# Altium PCB wulpus_pro_shield.PcbDoc (part 2 of 3)
Units mm, origin at the board's own origin, x right, y up, seen from the top; angles counter-clockwise.
Board outline 44.9 x 21 mm, 6 copper layers (Top Layer, Layer 2, Layer 3, Layer 4, Layer 5, Bottom Layer), stack 0.913 mm thick; 186 components, 134 nets, 731 pads, 283 vias.
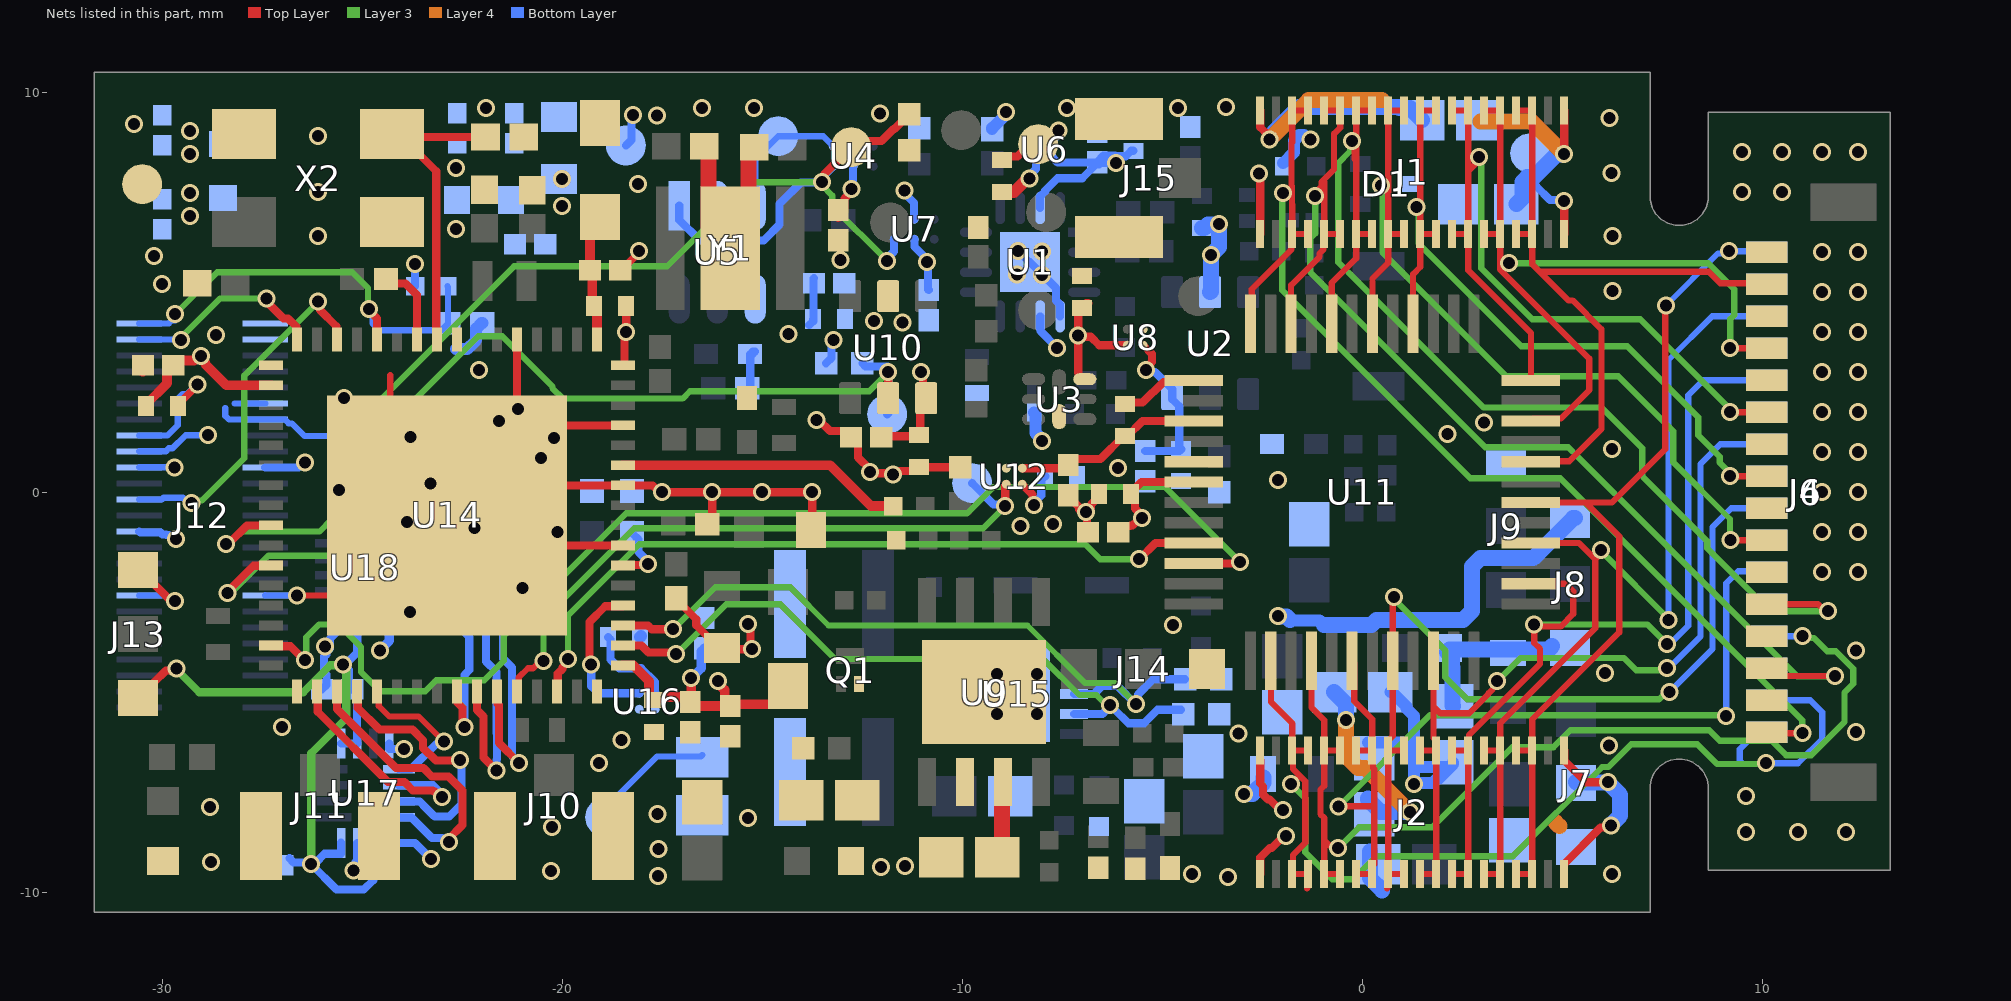
[diagram p6: the nets of this part, all layers, seen from the top]

## Part data (continued)
R15: library part CMP-2000-00700-2, Manufacturer=Panasonic, Package=0603, Power Rating=0.1W, Resistance=0Ω, Temperature="-55°C to +155°C", Temperature Coefficient=-100/+600ppm/°C, Temperature Range High=+155°C, Temperature Range Low=-55°C, Tolerance=5%, Voltage Rating=75V, Automotive=Yes, Automotive Grade="Grade 0", Category=Res, ComponentLink2Description=Datasheet, ComponentLink2URL=https://industrial.panasonic.com/cdbs/www-data/pdf/RDA0000/AOA0000C301.pdf, Composition="Thick Film", Device Class L1="Passive Components", Device Class L2=Resistors, Device Class L3="Chip SMD Resistors", Digikey Description="RES SMD 0 OHM JUMPER 1/10W 0603", Footprint Url=https://industrial.panasonic.com/cdbs/www-data/pdf/RDA0000/DMA0000COL17.pdf, Height=0.55mm, Ipc Land Pattern Name=RESC16080X45, Lead Free=Yes, Manufacturer Part Number=ERJ-3GEY0R00V, Mouser Description="Resistor, Chip Thick Film, 0 Ohm, 0.1w, Resistor, Chip Thick Film, 0 Ohm, 0.1w, 5%", Octopart=https://octopart.com/erj-3gey0r00v-panasonic-55389238, RoHS=TRUE, Series=ERJ
R21 R34: library part CMP-00030-23798141-1, Case/Package=0402, Max Operating Temperature=155°C, Min Operating Temperature=-55°C, Power Rating=63mW, Resistance=400Ohm, Temperature Coefficient=100ppm/°C, Tolerance=1%, Voltage Rating=50V, Composition="Thick Film", Height=350µm, Lead Free="Lead Free", NexarPartId=23798141, RoHS=Compliant, Schedule B="8533210045, 8533210045"
R23: "Resistor", Manufacturer_Name=Panasonic, Mouser Part Number=667-ERJ-PA3J302V, Datasheet Link=https://industrial.panasonic.com/cdbs/www-data/pdf/RDO0000/AOA0000C331.pdf, Height=0.55mm, Manufacturer_Part_Number=ERJ-PA3J302V, Mouser Price/Stock=https://www.mouser.co.uk/ProductDetail/Panasonic/ERJ-PA3J302V?qs=BzJM0faLVqU1ZJAPCjWnWA%3D%3D, Res="3k 1/3W"
R24: Manufacturer_Name=Panasonic, Mouser Part Number=667-ERJ-PA3J302V, Datasheet Link=https://industrial.panasonic.com/cdbs/www-data/pdf/RDO0000/AOA0000C331.pdf, Height=0.55mm, Manufacturer_Part_Number=ERJ-PA3J302V, Mouser Price/Stock=https://www.mouser.co.uk/ProductDetail/Panasonic/ERJ-PA3J302V?qs=BzJM0faLVqU1ZJAPCjWnWA%3D%3D, Res="3k 1/3W"
R26 R29: library part CMP-13261-002896-1, Case Code (Imperial)=0402, Case Code (Metric)=1005, Max Operating Temperature=155°C, Max Power Dissipation=63mW, Min Operating Temperature=-55°C, Resistance=390kR, Temperature Coefficient=100ppm/°C, Tolerance=1%, Voltage Rating (DC)=50V, Case/Package=0402, Composition="Thick Film", Contact Plating=Tin, Depth=0.5mm, Features="Moisture Resistant", Height=0.016inch, Lead Free="Lead Free", Length=0.039inch, Military Standard=Not, Number of Terminations=2, Packaging="Tape and Reel", Radiation Hardening=No, Width=0.02inch
R27 R28 R45: library part CMP-2002-00608-4, Case Code (Imperial)=0402, Case Code (Metric)=1005, Max Operating Temperature=155°C, Max Power Dissipation=100mW, Min Operating Temperature=-55°C, Package Quantity=1, Resistance=100kR, Temperature Coefficient=100ppm/°C, Tolerance=1%, Voltage Rating=50V, Case/Package=0402, Composition="Thick Film", Contact Plating=Tin, Depth=0.5mm, Features="Automotive AEC-Q200", Height=0.35mm, Lead Free="Lead Free", Length=1mm, Military Standard=Not, Mount="Surface Mount", Number of Pins=2, Number of Terminations=2, Packaging="Tape and Reel", Power Rating=100mW, Radiation Hardening=No, REACH SVHC="No SVHC", Termination=SMD/SMT, Voltage Rating (DC)=50V, Width=0.5mm
R31 R32: library part CMP-2002-08314-2, "RES Thick Film, 1MΩ, 1%, 0.063W, 100ppm/°C, 0402", Case Code (Imperial)=0402, Case Code (Metric)=1005, Max Operating Temperature=155°C, Max Power Dissipation=63mW, Min Operating Temperature=-55°C, Package Quantity=10, Resistance=1M, Temperature Coefficient=100ppm/°C, Tolerance=1%, Voltage Rating=50V, Case/Package=0402, Composition="Thick Film", Contact Plating=Tin, Depth=0.5mm, Features="Automotive AEC-Q200", Height=0.35mm, Lead Free="Lead Free", Length=1mm, Military Standard=Not, Number of Pins=2, Number of Terminations=2, Packaging="Tape and Reel", Power Rating=63mW, Radiation Hardening=No, Termination=SMD/SMT, Voltage Rating (DC)=50V, Weight=2.3E-05oz, Width=0.02inch
R33: library part CMP-00030-23798141-1, Case/Package=0402, Max Operating Temperature=155°C, Min Operating Temperature=-55°C, Power Rating=63mW, Resistance=22Ω, Temperature Coefficient=100ppm/°C, Tolerance=1%, Voltage Rating=50V, Composition="Thick Film", Height=350µm, Lead Free="Lead Free", NexarPartId=23798141, RoHS=Compliant, Schedule B="8533210045, 8533210045"
R35 R38: library part CMP-2002-07961-1, Manufacturer="Yageo / Phycomp", Resistance=22, Part Number=RC0402JR-0722RL
R36: library part CMP-2002-03257-1, Manufacturer="TE Connectivity / AMP", Resistance=324, Part Number=CPF0402B324RE1
R37: library part CMP-02407-007705-1, "RES Thick Film, 47kΩ, 1%, 0.063W, 100ppm/°C, 0402", Case Code (Imperial)=0402, Case Code (Metric)=1005, Max Operating Temperature=155°C, Min Operating Temperature=-55°C, Package Quantity=10000, Power Rating=63mW, Resistance=47k, Temperature Coefficient=100ppm/°C, Tolerance=1%, Voltage Rating=50V, Case/Package=0402, Composition="Thick Film", Contact Plating=Tin, Depth=0.5mm, Height=0.35mm, Lead Free="Lead Free", Length=1mm, Military Standard=Not, Mount="Surface Mount", Number of Terminations=2, Packaging="Tape and Reel", Radiation Hardening=No, Termination=SMD/SMT, Voltage Rating (DC)=50V, Weight=2.3E-05oz, Width=0.5mm, Working Voltage=50V
R39 R42: Manufacturer_Name=Panasonic, Mouser Part Number=667-ERJ-2RKF1004X, Resistance=1MOhm, Arrow Part Number=ERJ-2RKF1004X, Arrow Price/Stock=https://www.arrow.com/en/products/erj-2rkf1004x/panasonic?region=nac, Height=0.4mm, Manufacturer_Part_Number=ERJ-2RKF1004X, Mouser Price/Stock=https://www.mouser.co.uk/ProductDetail/Panasonic/ERJ-2RKF1004X?qs=H7k1u0Mp9JTG%252BclS6LVdqw%3D%3D, Res=1MOhm
R40: Manufacturer_Name=Panasonic, Mouser Part Number=667-ERJ-2RKF4322X, Resistance=43.2kOhm, Datasheet Link=https://industrial.panasonic.com/cdbs/www-data/pdf/RDA0000/AOA0000C86.pdf, Height=0.4mm, Manufacturer_Part_Number=ERJ-2RKF4322X, Mouser Price/Stock=http://www.mouser.com/Search/ProductDetail.aspx?qs=YMBIwoNQYdULE5GECeB%2fdA%3d%3d
R41: Manufacturer_Name=Panasonic, Mouser Part Number=667-ERJ-2RKF4122X, Resistance="41.2 kΩ", Arrow Part Number=ERJ-2RKF4122X, Arrow Price/Stock=https://www.arrow.com/en/products/erj-2rkf4122x/panasonic?utm_currency=USD&region=nac, Datasheet Link=https://industrial.panasonic.com/cdbs/www-data/pdf/RDA0000/AOA0000C86.pdf, Height=0.4mm, Manufacturer_Part_Number=ERJ-2RKF4122X, Mouser Price/Stock=https://www.mouser.co.uk/ProductDetail/Panasonic/ERJ-2RKF4122X?qs=YMBIwoNQYdUCaGOKDy4kUA%3D%3D
TP1 TP2 TP3 TP4 TP6 TP7 TP8 TP9 TP10 TP11 TP12 TP13 TP14 TP15: library part CMP-0484-00002-1, "Test Point, Surface Mount, Circular, Pad Diameter 1 mm"
U1: library part CMP-09116-000032-1, "IC OPAMP VGA 1 CIRCUIT 16LFCSP", Manufacturer="Analog Devices", Max Junction Temp=+150°C, Max Supply Voltage=5V, Min Supply Voltage=3V, Nominal Supply Current=3-6mA, Output Current per Channel=5mA, Package=CP-16-22, Temperature="-40°C to +85°C", Temperature Range High=+85°C, Temperature Range Low=-40°C, Voltage Gain=80dB, Automotive=No, Bandwidth=18MHz, Category=IC, ComponentLink2Description=Datasheet, ComponentLink2URL=https://www.analog.com/media/en/technical-documentation/data-sheets/AD8338.pdf, Device Class L1="Integrated Circuits (ICs)", Device Class L2="Linear ICs", Device Class L3="Amplifiers - Op Amps", Digikey Description="IC OPAMP VGA 1 CIRCUIT 16LFCSP", Height=0.8mm, Ipc Land Pattern Name=QFN50P300X300X75-16, Lead Free=Yes, Manufacturer Part Number=AD8338ACPZ-R7, Mouser Description="Special Purpose Amplifiers Ultra Low Pwr 18MHz SGL CH VGA", Number of Channels=1, Octopart=https://octopart.com/ad8338acpz-r7-analog+devices-21054770, RoHS=TRUE
U2 U10: library part CMP-0018-00480-2, "Very Low Power, Rail to Rail Out, Negative Rail In, VFB Operational Amplifier, 2.5 to 5.5 V, -40 to 125 degC, 6-pin SOT23 (DBV6), Green (RoHS & no Sb/Br)", Manufacturer="Texas Instruments", 2nd Harmonic(dBc)=85, 3rd Harmonic(dBc)=105, @ MHz=1, Acl, min stable gain(V/V)=1, BW @ Acl(MHz)=205, Code_JEDEC=MO-178, ComponentLink1Description="Manufacturer URL", ComponentLink1URL=http://www.ti.com/, ComponentLink2Description=Datasheet, ComponentLink2URL=http://www.ti.com/general/docs/lit/getliterature.tsp?genericPartNumber=OPA836&fileType=pdf, ComponentLink3Description="Package Specification", ComponentLink3URL=http://www.ti.com/litv/pdf/mpds026h, DatasheetVersion=SLOS712D, Eco-Plan="Green (RoHS & no Sb/Br)", Iib(Max)(nA)=1000, Io(Typ)(mA)=50, Iq per channel(Max)(mA)=1, Mounting Technology="Surface Mount", Number of Channels=1, PackageDescription="6-Pin Plastic Small Outline, Body 1.6 x 2.9 mm, Pitch 0.95 mm", PackageReference=DBV0006A, PackageVersion="4073253-5/K, 03/2006", PartNumber=OPA836IDBVT, Settling Time (0.1%)(Typ)(ns)=30, Slew Rate(Typ)(V/us)=560, Sub Family="Audio Operational Amplifier, High Output Current Amplifier (>=50mA), High Speed Amplifier (>=50MHz), Low Noise Amp (<=10nV/rtHz), Low Offset Voltage Amplifier (<=500uV), Low Supply Voltage Amplifier (<=2.7V)", Vio(Max)(mV)=0.4, Vn at Flatband(Typ)(nV/rtHz)=4.6, Vs(Max)(V)=5.5, Vs(Min)(V)=2.5
U3: library part CMP-0004-01511-1, "256-Tap, 100 k, Single Channel Potentiometer with SPI Interface, -40 to 125 degC, 8-pin QFN (RSE8), Green (RoHS & no Sb/Br)", Manufacturer="Texas Instruments", Code_JEDEC=MO-288, ComponentLink1Description="Manufacturer URL", ComponentLink1URL=http://www.ti.com/, ComponentLink2Description=Datasheet, ComponentLink2URL=http://www.ti.com/general/docs/lit/getliterature.tsp?genericPartNumber=TPL0501-100&fileType=pdf, ComponentLink3Description="Package Specification", ComponentLink3URL=http://www.ti.com/litv/pdf/mpqf207b, DAC Channels=1, DatasheetVersion=SLIS136A, DNL(Max)(+/-LSB)=0.5, Eco-Plan="Green (RoHS & no Sb/Br)", INL(Max)(+/-LSB)=1, Interface=SPI, Mounting Technology="Surface Mount", PackageDescription="8-Pin Plastic Quad Flatpack No-Pin, 1.5 x 1.5 mm Body, 0.5 mm Pitch", PackageReference=RSE8, PackageVersion="4207268-2/D, 01/2011", PartNumber=TPL0501-100RSER, Settling Time(us)=3, SubFamily="Digital Potentiometer"
U4 U7: "Analogue Switch ICs SPDT ANALOG SWITCH", Manufacturer_Name="Texas Instruments", Arrow Part Number=TS5A3159AYZPR, Arrow Price/Stock=https://www.arrow.com/en/products/ts5a3159ayzpr/texas-instruments?utm_currency=USD&region=nac, Datasheet Link=https://www.ti.com/lit/ds/symlink/ts5a3159a.pdf?ts=1623385377964&ref_url=https%253A%252F%252Fwww.ti.com%252Fproduct%252FTS5A3159A, Geometry.Height=0.5mm, Manufacturer_Part_Number=TS5A3159AYZPR
U5: library part CMP-09141-000004-1, "IC RF DETECT 100KHZ-1GHZ TSOT23", Manufacturer="Analog Devices", Max Frequency=1000MHz, Max Junction Temp=+125°C, Package=TSOT-23, Temperature="-40°C to +85°C", Temperature Range High=+85°C, Temperature Range Low=-40°C, Automotive=No, Bandwidth=999.9MHz, Category=IC, ComponentLink2Description=Datasheet, ComponentLink2URL=https://www.analog.com/media/en/technical-documentation/data-sheets/5507f.pdf, Device Class L1="Integrated Circuits (ICs)", Device Class L2="RF Semiconductors and Devices", Device Class L3=unset, Digikey Description="IC RF DETECT 100KHZ-1GHZ TSOT23", Height=1mm, Ipc Land Pattern Name=SOT95P280X91-6, Lead Free=Yes, Manufacturer Part Number=LTC5507ES6#TRMPBF, Mouser Description="RF Detector 0.1MHz to 1000MHz 14dBm Automotive 6-Pin TSOT-23 T/R", Octopart=https://octopart.com/ltc5507es6%23trmpbf-analog+devices-88320008, RoHS=TRUE, Standoff Height=0.01mm
U6 U8 U12 U16: "TPS22916 5.5-V, 2-A Ultra-Low Leakage Load Switch", Manufacturer_Name="Texas Instruments", Arrow Part Number=TPS22916CYFPR, Arrow Price/Stock=https://www.arrow.com/en/products/tps22916cyfpr/texas-instruments?utm_currency=USD&region=nac, Datasheet Link=http://www.ti.com/lit/gpn/tps22916, Geometry.Height=0.5mm, Manufacturer_Part_Number=TPS22916CYFPR
U9: "Integrated Circuit", Manufacturer_Name=LITTELFUSE, Mouser Part Number=849-IXDD604D2TR, Arrow Part Number=IXDD604D2TR, Arrow Price/Stock=https://www.arrow.com/en/products/ixdd604d2tr/ixys, Datasheet Link=http://www.ixysic.com/home/pdfs.nsf/www/IXD_604.pdf/$file/IXD_604.pdf, Height=1mm, Manufacturer_Part_Number=IXDD604D2TR, Mouser Price/Stock=https://www.mouser.co.uk/ProductDetail/IXYS-Integrated-Circuits/IXDD604D2TR?qs=RF%252Bx3zajg8LeQlBgW9OO7w%3D%3D
U11: "16-CH 200V No Hv Bias Switch (SPST), 2 Bleed Resistor 48 LQFP 7X7X1.4MM T/r Rohs Compliant: Yes", Manufacturer=Microchip, Category="Decoders and Multiplexers", Manufacturer Part Number=HV2707T-C/R8X, Pricing 1="1=19.01000, 25=15.84720, 100=14.65500 (USD)", RoHS=Yes, Stock 1=440, Supplier 1=Digi-Key
U14: "No Description Available", Mfr_Name="Texas Instruments", Copyright="Copyright (C) 2021 Ultra Librarian. All rights reserved.", Manufacturer_Part_Number=MSP430FR5043IRGCT, RefDes=RefDes, Type=DEV
U15: library part CMP-0478-00030-1, "Dual Micropower DC/DC Converters with Schottky Diodes, 2.4 to 15 V Vin, 10-pin SON (DD-10), -40 to 85 degC, Pb-Free", Manufacturer="Linear Technology", PartNumber=LT3463AEDD#PBF, Code_JEDEC=MO-229, ComponentLink1Description="Manufacturer URL", ComponentLink1URL=http://www.linear.com/, ComponentLink2Description=Datasheet, ComponentLink2URL=http://cds.linear.com/docs/en/datasheet/3463f.pdf, ComponentLink3Description="Package Specification", ComponentLink3URL=http://cds.linear.com/docs/en/packaging/DFN_10_05-08-1699.pdf, Mounting Technology="Surface Mount", Number Of Outputs=2, PackageDescription="10-Pin Plastic DFN, Body 3 x 3 mm, Pitch 0.5 mm", PackageReference=DD-10, PackageVersion="Rev. C, 06/2010", RoHS=TRUE, Vin Max(V)=15, Vin Min(V)=2.4
U17 U18: "Voltage Level Translator Bidirectional 1 Circuit 4 Channel 380Mbps 16-UQFN _2.6x1.8_", Package="UQFN-16 Texas Instruments", Digi-Key_Part_Number=296-24741-1-ND, DigiKey-Purchase-URL=https://snapeda.com/shop?store=DigiKey&id=192411, MF="Texas Instruments", MP=SN74AVC4T774RSVR, SnapEDA_Link=https://www.snapeda.com/parts/SN74AVC4T774RSVR/Texas%20Instruments/view-part/192411/?ref=snap
X2: "Crystal 8MHz ±30ppm (Tol) ±30ppm (Stability) 18pF FUND 100Ohm 4-Pin SMD T/R", Case/Package=SMD/SMT, ESR (Equivalent Series Resistance)=100R, Frequency=8MHz, Frequency Stability=30ppm, Load Capacitance=18pF, Manufacturer=Diodes, Max Operating Temperature=85°C, Min Operating Temperature=-40°C, Supplier Part Number 1=FY0800018CT-ND, Category=Crystals, ComponentLink1Description=http://media.digikey.com/pdf/Data%20Sheets/Pericom%20PDFs/FY0800018_VerB.pdf?src-supplier=Digi-Key, ComponentLink1URL=http://media.digikey.com/pdf/Data%20Sheets/Pericom%20PDFs/FY0800018_VerB.pdf?src-supplier=Digi-Key, Frequency Tolerance=30ppm, Height=0.043inch, Length=0.197inch, Manufacturer Part Number=FY0800018, Mount="Surface Mount", Packaging="Cut Tape", Pricing 1="1=0.80000, 10=0.70800, 50=0.66220, 100=0.58520, 500=0.55440 (USD)", RoHS=Yes, Stock 1=10869, Supplier 1=Digi-Key, Width=0.126inch
Y1: "No Description Available", Frequency=8MHz, Mfr_Name=Abracon, Copyright="Copyright (C) 2021 Ultra Librarian. All rights reserved.", Manufacturer_Part_Number=AWSCR-8.00CV-T, RefDes=RefDes, Type=DEV
Y2: library part CMP-27762-000002-3, "CRYSTAL 32.7680KHZ 9PF SMD", Case/Package=CSMD, ESR (Equivalent Series Resistance)=90kR, Frequency=32.768kHz, Frequency Tolerance=20ppm, Load Capacitance=9pF, Max Operating Temperature=85°C, Min Operating Temperature=-40°C, Operating Frequency="32.768 kHz", Package Quantity=3000, Depth=1mm, Height=0.5mm, Lead Free="Lead Free", Length=1.6mm, Mount="Surface Mount", Number of Pins=2, Packaging="Tape and Reel", Radiation Hardening=No, REACH SVHC="No SVHC", RoHS Compliant=Yes, Series=ABS05, Series Resistance=90kR, Termination=SMD/SMT, Tolerance=20ppm, Width=1mm

## Via types
v1: diameter 0.45, hole 0.3, Top Layer to Bottom Layer, tented both sides, 283 vias

## Nets (pads, with @x,y where several pads share a name; then routed paths per layer and width w, separated by ;. In a path a pad name is that pad's centre, name@x,y a point inside that pad or via, vN(x,y) a via of type N, cw(c..) or ccw(c..) an arc to the next point about the centre after c; other vN are vias at no path point)
+5V: C74.2 J12.42 U12.A2 | length 3.4
  Top Layer w0.203: U12.A2@-8.5,0.2 -8.5,0.194 -8.247,-0.059 -8.247,-0.278 v1(-8.2,-0.325)
  Bottom Layer w0.16: J12.42@-30.575,1.02 -29.914,1.02 -29.838,1.096 -29.743,1.096 -29.414,1.425 v1(-28.85,1.425)
  Bottom Layer w0.203: v1(-8.2,-0.325) -8.2,-0.258 -8.023,-0.082 -8.023,0.302 C74.2@-7.925,0.4
  other v1: -22.075,3.05
+HV: C22.1 C61.1 FB2.2 J8.1 R23.1 U9.6 | length 10.3
  Bottom Layer w0.203: v1(-2.955,-7.55) -2.888,-7.55 -2.879,-7.54 -2.819,-7.481 R23.1@-2.686,-7.481
  Bottom Layer w0.3: -1.803,-3.197 -1.732,-3.197 -1.724,-3.205 -1.07,-3.205 -0.95,-3.325
  Bottom Layer w0.4: v1(-2.955,-7.55) -2.946,-7.54 -2.879,-7.54 -2.746,-7.54 -2.686,-7.481 -2.463,-7.257 R23.1@-2.463,-7.132 ; v1(-2.1,-3.1) -2.09,-3.11 -1.89,-3.11 -1.803,-3.197 ; -0.95,-3.325 0.23,-3.325 0.355,-3.2 2.516,-3.2 2.75,-2.966 2.75,-1.855 2.955,-1.65 4.275,-1.65 5.275,-0.65 J8.1@5.325,-0.65
  other v1: -12.025,-9.375 -11.425,-9.35
+V_HV_MUX: C26.1 C27.2 U11.15 U12.A1 | length 4.8
  Top Layer w0.203: U12.A1@-8.5,0.6 -7.58,0.6 -7.351,0.829 -6.546,0.829 -5.975,1.4 C26.1@-5.925,1.4 -5.875,1.4 -5.497,1.778 U11.15@-4.216,1.778
+V_IN_HV: C59.1 L3.1 L4.1 TP12.1 U15.3 U16.A1 | length 3.2
  Bottom Layer w0.152: TP12.1@-18.925,-8.123 -18.925,-7.9 -18.15,-7.125 -17.633,-6.608 -16.535,-6.608 C59.1@-16.5,-6.574
+V_IO_IN: C69.1 C71.1 J12.6 J12.7 J13.3 R45.2 U17.5 U17.6 U17.14 U17.16 U18.14 U18.15 | length 24.5
  Top Layer w0.203: J13.3@-30.6,-5.15 -30.55,-5.15 -30.201,-4.801 -30.201,-4.751 -29.906,-4.456 -29.693,-4.456 v1(-29.646,-4.408)
  Layer 3 w0.203: v1(-29.646,-4.408) -29.658,-4.408 -29.662,-4.413 -29.075,-5 -26.475,-5 -25.801,-4.326 -25.497,-4.326 v1(-25.477,-4.306) ; v1(-26.275,-9.3) -26.275,-6.525 -25.401,-5.651 v1@-25.401,-4.321
  Bottom Layer w0.152: -28.424,2.101 -28.424,1.909 -28.335,1.82 -26.935,1.82 -26.838,1.722 -26.761,1.722 -26.442,1.404 -25.606,1.404 R45.2@-25.427,1.225 ; -28.188,2.22 J12.6@-27.425,2.22
  Bottom Layer w0.203: C69.1@-26.82,-9.15 -26.717,-9.253 -26.372,-9.253 v1@-26.347,-9.228 ; U17.16@-25.533,-8.756 -25.533,-9.037 -25.945,-9.037 -26.161,-9.253 -26.217,-9.253 -26.275,-9.195 v1(-26.275,-9.3) -25.64,-9.935 -24.961,-9.935 -24.725,-9.699 U17.14@-24.725,-8.77 ; U17.5@-25.525,-6.28 U17.6@-25.125,-6.28 -25.133,-6.272 -25.133,-5.037 C71.1@-25.245,-4.925 -25.333,-4.837 -25.333,-4.442 -25.427,-4.348 v1@-25.427,-4.314 ; v1(-25.477,-4.306) -25.47,-4.314 v1@-25.427,-4.314 ; U18.14@-24.725,-3.12 U18.15@-25.125,-3.12 -25.125,-4.006 -25.38,-4.261 -25.38,-4.267 v1@-25.427,-4.314
+V_PREAMP: C12.1 C16.2 U2.6 U8.A1 | length 4.1
  Top Layer w0.203: U8.A1@-5.475,3.675 -5.261,3.461 -5.261,3.256 -5.4,3.117 v1(-5.4,3.05)
  Bottom Layer w0.203: C16.2@-5.425,1.03 -4.57,1.03 C12.1@-4.525,1.075 ; v1(-5.4,3.05) -5.353,3.003 -5.178,3.003 -4.75,2.575 -4.75,2.325 -4.575,2.15 C12.1@-4.575,1.075
+V_RX: C10.2 C11.1 C14.1 C15.2 C18.1 C19.2 C24.1 C25.2 C67.1 C72.2 C73.2 C75.2 C76.2 FB4.2 TP14.1 U3.7 U4.B2 U5.4 U6.A2 U7.B2 U8.A2 U10.6 | length 13.6
  Top Layer w0.203: C75.2@-13.1,6.855 -12.942,7.014 -12.942,7.345 -12.767,7.52 v1(-12.767,7.587) ; C25.2@-12.02,1.375 -11.995,1.4 -11.05,1.4 -11.05,2.2 U10.6@-10.9,2.35 -10.978,2.428 -10.978,2.953 v1(-11.025,3) ; C72.2@-8.96,8.29 -8.858,8.392 -8.617,8.392 -8.309,8.7 TP14.1@-8.1,8.7 ; TP14.1@-8.1,8.686 -7.809,8.686 -7.809,8.825 v1(-7.593,9.041) ; v1@-7.1,3.886 -6.786,3.886 -6.575,3.675 U8.A2@-5.875,3.675 ; v1@-7.1,3.886 -7.1,2.992 -7.094,2.986 -7.094,2.87 -7.049,2.825 U3.7@-6.935,2.825 ; v1(-7.1,3.914) -7.1,4.475 -6.998,4.577 -6.998,4.627 -6.9,4.725 C73.2@-6.85,4.725
  Bottom Layer w0.203: C10.2@-15.371,2.5 -15.3,2.571 C11.1@-15.3,3.45 C11.1@-15.237,3.513 ; C11.1@-15.25,3.45 C11.1@-15.181,3.519 ; U5.4@-15.237,4.773 U5.4@-15.175,4.834 ; C18.1@-13.823,4.177 -13.725,4.275 C18.1@-13.725,4.325 -13.715,4.335 -13.715,5.34 C19.2@-13.705,5.35 ; v1(-12.767,7.587) -12.729,7.624 -12.729,8.146 U4.B2@-12.725,8.15 ; U7.B2@-11.2,6.325 -11.196,6.321 -11.196,6.137 -10.875,5.817 v1(-10.875,5.75) -10.857,5.732 -10.857,5.073 C76.2@-10.839,5.055 ; U6.A2@-7.744,8.781 -7.746,8.783 -7.746,8.786 -7.641,8.891 -7.641,8.994 v1(-7.593,9.041)
  other v1: -14.338,3.951 -20,7.15 -20,7.825
+V_RX_CONN: C66.1 FB4.1 J12.41 | length 0.9
  Layer 3 w0.203: v1@-29.712,0.641 v1(-29.693,0.622)
  Bottom Layer w0.16: J12.41@-30.575,0.62 J12.41@-30.575,0.62 v1@-29.694,0.621 ; v1@-29.694,0.621 v1(-29.693,0.622)
  other v1: -22.651,6.575 -22.65,8.1
+V_VGA: C13.1 C17.2 U1.6 U1.15 U6.A1 | length 6.2
  Bottom Layer w0.203: U1.6@-8.053,4.104 U1.6@-8.053,4.397 -8.046,4.39 -8.046,4.03 v1(-7.628,3.612) -7.592,3.575 v1@-7.507,3.575 ; U1.15@-8.053,7.103 -8.053,7.396 -7.924,7.525 -7.924,7.54 -7.614,7.85 -7,7.85 -6.625,8.225 C17.2@-6.625,8.245 ; U6.A1@-7.725,8.35 -7.719,8.35 -7.614,8.245 C17.2@-6.625,8.245 ; C17.2@-6.578,8.197 C17.2@-6.615,8.235 ; v1(-6.15,8.225) -6.16,8.235 C17.2@-6.615,8.235 ; C13.1@-5.724,8.536 -5.774,8.536 -5.912,8.399 -6.16,8.399 -6.18,8.419 -6.467,8.419 -6.625,8.26 C17.2@-6.625,8.245 ; C17.2@-6.625,8.245 C17.2@-6.615,8.235
+VBAT: C80.2 J12.1 J12.2 U16.A2 | length 2.2
  Bottom Layer w0.203: C80.2@-18.85,-3.625 -18.796,-3.679 -18.796,-4.179 -18.575,-4.4 -18.025,-4.4 -17.679,-4.746 -17.679,-5.021 U16.A2@-17.675,-5.025
+VCC_MSP430_CONN: C64.1 FB3.1 J12.10 | length 1.1
  Bottom Layer w0.203: J12.10@-27.425,0.62 -26.597,0.62 -26.468,0.75 v1(-26.426,0.75)
  other v1: -29.3,6.9 -29.3,7.475
-HV: C57.1 FB1.2 J8.3 R24.1 | length 4.1
  Bottom Layer w0.4: FB1.2@2.12,-3.995 2.25,-4.125 2.25,-4.378 2.256,-4.384 2.256,-5.331 C57.1@2.275,-5.349 ; FB1.2@2.125,-4 2.188,-3.937 4.663,-3.937 J8.3@4.75,-3.85
AVCC1: C43.2 C46.1 L2.2 U14.1 | length 3.2
  Top Layer w0.24: U14.1@-19.13,3.82 -19.13,4.58 C43.2@-19.2,4.65 -19.252,4.703 -19.252,5.498 C46.1@-19.305,5.55 -19.305,6.62 L2.2@-19.05,6.875
BOT_EL: C30.1 C31.1 C32.1 C33.1 J1.1 J1.2 J1.39 J1.40 J2.1 J2.2 J2.39 J2.40 J7.2 TP11.1 | length 30.7
  Top Layer w0.203: v1(-2.585,7.964) -2.55,7.929 J1.1@-2.55,6.46 ; J2.40@-2.55,-9.54 -2.548,-9.538 -2.548,-9.133 -2.313,-8.897 -2.264,-8.897 -1.967,-8.6 v1(-1.9,-8.6) ; J2.39@-2.55,-6.709 -2.55,-7.281 -2.479,-7.353 -2.479,-7.561 -2.36,-7.68 -2.312,-7.68 -2.042,-7.95 v1(-1.975,-7.95) ; J1.2@-2.55,9.54 -2.548,9.539 -2.548,9.123 -2.364,8.939 -2.364,8.868 v1(-2.317,8.821) ; J2.1@5.05,-6.46 5.05,-6.707 5.052,-6.709 5.593,-7.25 v1(6.15,-7.25) ; J1.39@5.05,6.46 v1(5.05,7.275) ; v1(5.05,8.45) J1.40@5.05,9.54 ; J2.2@5.052,-9.291 5.96,-8.383 6.167,-8.383 v1(6.214,-8.336)
  Layer 4 w0.4: v1(-2.317,8.821) -1.338,9.8 0.5,9.8 ; v1(-0.4,-5.7) -0.4,-6.6 -0.1,-6.9 0.087,-6.9 1.187,-8 v1(1.2,-8) ; 2.962,9.272 4.228,9.272 v1(5.05,8.45) ; 4.831,-8.25 4.931,-8.35
  Bottom Layer w0.203: 4.125,7.875 4.35,7.65 4.694,7.306 5.019,7.306 v1(5.05,7.275)
  Bottom Layer w0.4: v1(-2.317,8.821) -2.317,8.835 -2.207,8.945 -2.207,9 -1.582,9.625 0.913,9.625 0.934,9.603 1.196,9.603 C31.1@1.499,9.3 ; C32.1@-0.701,-5 -0.41,-5.291 -0.41,-5.69 v1(-0.4,-5.7) ; C33.1@0.147,-7.653 0.147,-7.687 0.45,-7.99 1.19,-7.99 v1(1.2,-8) ; C30.1@3.851,7.2 4.01,7.36 4.01,7.76 4.125,7.875 4.287,7.875 4.853,8.44 5.04,8.44 v1(5.05,8.45) ; J7.2@5.35,-7.25 5.36,-7.26 6.14,-7.26 v1(6.15,-7.25) 6.15,-7.264 6.45,-7.564 6.45,-8.086 6.214,-8.322 v1(6.214,-8.336)
CH0_OUT: R13.1 U14.59 | length 7.2
  Top Layer w0.24: U14.59@-18.48,0.67 -13.295,0.67 -12.281,-0.344 -11.733,-0.344 R13.1@-11.727,-0.35
CH1_OUT: R32.1 U14.54 | length 1.6
  Top Layer w0.203: U14.54@-18.48,-1.83 -18.465,-1.815 -17.865,-1.815 v1(-17.85,-1.8)
  Bottom Layer w0.203: R32.1@-18.25,-1.025 -18.092,-1.183 -18.092,-1.491 -17.85,-1.733 v1(-17.85,-1.8)
CH_0: J1.5 J1.6 J1.7 J1.8 J4.1 U11.12 | length 28
  Top Layer w0.152: U11.12@-2.794,4.216 -2.763,4.247 -2.763,5.075 -1.774,6.064 -1.774,6.436 J1.5@-1.75,6.46 ; v1(-1.975,7.475) -1.925,7.475 -1.768,7.632 ; J1.7@-1.35,6.46 J1.5@-1.75,6.46 ; J1.8@-1.35,9.54 J1.6@-1.75,9.54 -1.75,8.75 -1.768,8.732 -1.768,7.632 ; J4.1@10.114,-6 10.139,-6.025 v1(11.01,-6.025) ; -1.768,7.632 -1.751,7.649 -1.751,7.198 -1.75,7.197 J1.5@-1.75,6.46
  Layer 3 w0.152: v1(-1.975,7.475) -2,7.45 -2,5.05 2.7,0.35 4.95,0.35 10.999,-5.699 10.999,-6.014 v1(11.01,-6.025)
CH_1: J1.9 J1.10 J1.11 J1.12 J4.3 U11.10 | length 28.2
  Top Layer w0.152: U11.10@-1.778,4.216 -1.778,5.176 -1.064,5.89 -1.064,5.973 -0.974,6.064 -0.974,6.436 J1.9@-0.95,6.46 ; v1(-1.175,7.4) -1.175,7.481 -1.02,7.635 -1.02,7.755 ; J1.10@-0.95,9.54 J1.12@-0.55,9.54 -0.55,9.113 -0.701,8.962 -0.701,8.074 -1.02,7.755 ; J1.11@-0.55,6.46 J1.9@-0.95,6.46 ; J4.3@10.114,-4.4 10.305,-4.59 11.815,-4.59 v1(11.825,-4.6) ; -1.02,7.755 -0.95,7.755 J1.9@-0.95,6.46
  Layer 3 w0.152: v1(-1.175,7.4) -1.175,6.472 -1.3,6.347 -1.3,5.5 3.075,1.125 5.15,1.125 10.875,-4.6 v1(11.825,-4.6)
CH_2: J1.13 J1.14 J1.15 J1.16 J4.5 U11.8 | length 28.2
  Top Layer w0.152: U11.8@-0.762,4.216 -0.762,5.235 -0.15,5.847 J1.13@-0.15,6.46 ; J1.16@0.232,9.558 J1.16@0.25,9.54 J1.14@-0.15,9.54 v1@-0.15,8.775 ; J1.15@0.25,6.46 J1.13@-0.15,6.46 ; J4.5@10.114,-2.8 11.394,-2.8 11.569,-2.975 v1(11.65,-2.975) ; J1.13@-0.15,6.46 -0.15,8.285 ; -0.15,8.285 -0.193,8.328 -0.193,8.718 v1(-0.25,8.775) v1@-0.15,8.775 ; -0.15,8.285 v1@-0.15,8.775
  Layer 3 w0.152: v1(-0.25,8.775) -0.307,8.718 -0.307,8.518 -0.601,8.224 -0.601,5.751 3.033,2.117 5.983,2.117 7,1.1 7,0.4 8.625,-1.225 8.625,-1.4 10.2,-2.975 v1(11.65,-2.975)
CH_3: J1.17 J1.18 J1.19 J1.20 J4.7 U11.6 | length 21.6
  Top Layer w0.152: U11.6@0.254,4.216 0.254,5.343 0.65,5.739 J1.17@0.65,6.46 ; v1(0.475,7.665) 0.527,7.665 v1@0.65,7.788 ; J1.18@0.626,9.564 J1.18@0.65,9.54 ; J1.19@1.05,6.46 J1.17@0.65,6.46 ; J1.20@1.05,9.54 J1.18@0.65,9.54 ; v1(9.206,-1.2) J4.7@10.114,-1.2 ; J1.17@0.65,6.46 v1@0.65,7.788 ; v1@0.65,7.788 J1.18@0.65,9.54
  Layer 3 w0.152: v1(0.475,7.665) 0.508,7.632 0.508,5.992 3.6,2.9 6.4,2.9 7.775,1.525 7.775,0.75 9.194,-0.669 9.194,-1.188 v1(9.206,-1.2)
CH_4: J1.21 J1.22 J1.23 J1.24 J4.9 U11.4 | length 18.9
  Top Layer w0.152: U11.4@1.27,4.216 1.27,5.451 1.45,5.631 J1.21@1.45,6.46 ; v1(1.353,7.125) 1.353,7.206 v1@1.45,7.302 ; 1.45,7.35 v1@1.45,7.302 ; J1.23@1.85,6.46 J1.21@1.45,6.46 ; J1.24@1.874,9.564 J1.24@1.85,9.54 J1.22@1.45,9.54 v1@1.45,7.302 ; v1(9.2,0.4) J4.9@10.114,0.4 ; J1.21@1.45,6.46 v1@1.45,7.302
  Layer 3 w0.152: v1(1.353,7.125) 1.41,7.068 1.41,6.215 3.975,3.65 6.625,3.65 8.4,1.875 8.4,1.425 8.938,0.887 8.938,0.743 9.2,0.481 v1(9.2,0.4)
CH_5: J1.25 J1.26 J1.27 J1.28 J4.11 U11.48 | length 20.1
  Top Layer w0.152: J1.25@2.25,6.46 J1.27@2.65,6.46 ; J1.26@2.25,9.54 J1.28@2.65,9.54 2.65,8.019 ; v1(2.925,8.375) 2.925,8.294 2.65,8.019 ; U11.48@4.216,2.794 4.216,3.985 2.65,5.551 J1.27@2.65,6.46 ; v1(9.2,2) J4.11@10.114,2 ; J1.27@2.65,6.46 2.65,8.019
  Layer 3 w0.152: v1(2.925,8.375) 2.975,8.325 2.975,5.6 4.25,4.325 6.95,4.325 9.2,2.075 v1(9.2,2)
CH_6: J1.29 J1.30 J1.31 J1.32 J4.13 U11.46 | length 19.1
  Top Layer w0.152: J1.29@3.05,6.46 J1.31@3.45,6.46 ; J1.30@3.05,9.54 J1.32@3.45,9.54 ; J1.32@3.474,9.564 J1.32@3.45,9.54 ; v1(3.675,5.725) 3.651,5.701 3.45,5.701 ; U11.46@4.216,1.778 4.28,1.841 4.962,1.841 5.675,2.554 5.675,3.343 3.45,5.567 3.45,5.701 ; v1(9.2,3.6) J4.13@10.114,3.6 ; 3.45,5.701 J1.31@3.45,6.46 ; J1.31@3.45,6.46 J1.32@3.45,9.54
  Layer 3 w0.152: v1(3.675,5.725) 8.65,5.725 9.3,5.075 9.3,4.428 9.2,4.328 v1(9.2,3.6)
CH_7: J1.33 J1.34 J1.35 J1.36 J4.15 U11.44 | length 17.4
  Top Layer w0.152: J1.33@3.85,6.46 J1.35@4.25,6.46 ; J1.34@3.85,9.54 J1.36@4.25,9.54 J1.35@4.25,6.46 ; U11.44@4.216,0.762 4.229,0.775 5.175,0.775 5.977,1.577 5.977,4.078 5.26,4.795 5.155,4.795 4.437,5.513 ; J4.15@10.114,5.2 10.089,5.225 8.95,5.225 8.662,5.513 4.437,5.513 ; J1.35@4.25,6.46 4.25,5.7 4.437,5.513
CH_8: J2.5 J2.6 J2.7 J2.8 J6.1 U11.42 | length 21.9
  Top Layer w0.152: J2.8@3.85,-9.54 J2.6@4.225,-9.54 ; J2.7@3.85,-6.46 J2.5@4.25,-6.46 ; U11.42@4.216,-0.254 5.579,-0.254 ; J2.6@4.25,-9.54 J2.5@4.25,-6.46 ; v1(7.593,4.668) 7.575,4.65 7.575,1.075 6.246,-0.254 5.579,-0.254 ; J2.5@4.25,-6.46 4.25,-5.68 6.425,-3.505 6.425,-1.1 5.579,-0.254
  Bottom Layer w0.152: v1(7.593,4.668) 8.893,5.968 9.118,5.968 v1(9.175,6.025) 10.089,6.025 J6.1@10.114,6
CH_9: J2.9 J2.10 J2.11 J2.12 J6.3 U11.40 | length 23.6
  Top Layer w0.152: J2.12@3.05,-9.54 J2.10@3.45,-9.54 J2.9@3.45,-6.46 ; J2.11@3.05,-6.46 J2.9@3.45,-6.46 ; U11.40@4.216,-1.27 5.42,-1.27 5.825,-1.675 ; v1(5.974,-1.444) 5.974,-1.525 5.825,-1.674 5.825,-1.675 ; J2.9@3.45,-6.46 3.45,-5.775 5.825,-3.4 5.825,-1.675
  Layer 3 w0.152: v1(5.974,-1.444) 5.974,-1.524 6.02,-1.524 7.657,-3.16 v1(7.657,-3.193)
  Bottom Layer w0.152: v1(7.657,-3.193) 7.657,3.307 8.75,4.4 J6.3@10.114,4.4 J6.3@10.089,4.425
CH_10: J2.13 J2.14 J2.15 J2.16 J6.5 U11.38 | length 22.8
  Top Layer w0.152: J2.16@2.25,-9.54 J2.14@2.65,-9.54 J2.13@2.65,-6.46 ; J2.15@2.25,-6.46 J2.13@2.65,-6.46 ; U11.38@4.216,-2.286 5.087,-2.287 5.275,-2.475 5.275,-3.042 4.959,-3.359 v1@4.359,-3.359 ; v1(4.3,-3.309) 4.309,-3.309 v1@4.359,-3.359 ; J2.13@2.65,-6.46 2.674,-6.436 2.674,-6.064 4.445,-4.293 4.445,-3.914 4.3,-3.769 4.3,-3.417 v1@4.359,-3.359
  Layer 3 w0.152: v1(4.3,-3.309) 7.134,-3.309 v1(7.625,-3.8)
  Bottom Layer w0.152: v1(7.625,-3.8) 7.688,-3.8 8.15,-3.338 8.15,2.425 8.525,2.8 J6.5@10.114,2.8
CH_11: J2.17 J2.18 J2.19 J2.20 J6.7 U11.34 | length 20.2
  Top Layer w0.152: J2.20@1.45,-9.54 J2.18@1.85,-9.54 J2.17@1.85,-6.46 ; J2.19@1.45,-6.46 J2.17@1.85,-6.46 ; U11.34@1.778,-4.216 1.778,-5.35 ; v1(3.375,-4.725) 3.375,-4.806 3.16,-5.021 3.16,-5.041 2.676,-5.525 1.953,-5.525 1.778,-5.35 ; 1.778,-5.35 1.778,-6.138 1.85,-6.21 J2.17@1.85,-6.46
  Layer 3 w0.152: v1(3.375,-4.725) 3.961,-4.139 6.539,-4.139 6.85,-4.45 7.575,-4.45 v1(7.625,-4.4)
  Bottom Layer w0.152: v1(7.625,-4.4) 7.663,-4.4 8.452,-3.611 8.452,0.702 8.95,1.2 J6.7@10.114,1.2
CH_12: J2.21 J2.22 J2.23 J2.24 J6.9 U11.32 | length 22.4
  Top Layer w0.152: 0.624,-9.903 0.626,-9.901 ; v1(0.8,-2.625) 0.762,-2.663 U11.32@0.762,-4.216 0.762,-6.098 0.65,-6.21 J2.23@0.65,-6.46 ; J2.22@1.05,-9.54 J2.24@0.65,-9.54 J2.23@0.65,-6.46 ; J2.21@1.05,-6.46 J2.23@0.65,-6.46
  Layer 3 w0.152: v1(0.8,-2.625) 0.8,-2.68 2.075,-3.955 2.075,-4.625 2.625,-5.175 3.187,-5.175 3.188,-5.176 7.42,-5.176 7.599,-4.998 v1(7.679,-4.998)
  Bottom Layer w0.152: v1(7.679,-4.998) 8.755,-3.922 8.755,-0.87 9.225,-0.4 J6.9@10.114,-0.4 J6.9@10.07,-0.356
CH_13: J2.25 J2.26 J2.27 J2.28 J6.11 U11.30 | length 22.7
  Top Layer w0.152: v1(-0.594,-7.86) -0.584,-7.85 0.3,-7.85 ; U11.30@-0.254,-4.216 -0.2,-4.27 -0.2,-5.225 0.25,-5.675 J2.25@0.25,-6.46 ; J2.28@-0.126,-9.279 -0.15,-9.303 J2.28@-0.15,-9.54 J2.26@0.25,-9.54 ; J2.27@-0.126,-6.721 -0.15,-6.697 J2.27@-0.15,-6.46 J2.25@0.25,-6.46 ; J2.26@0.3,-9.3 0.3,-7.85 ; J2.25@0.25,-6.46 0.274,-6.484 0.274,-6.891 0.3,-6.917 0.3,-7.85
  Layer 3 w0.152: v1(-0.594,-7.86) 1.691,-5.575 9.075,-5.575 v1(9.1,-5.6)
  Bottom Layer w0.152: v1(9.1,-5.6) 9.1,-2.275 9.4,-1.975 10.089,-1.975 J6.11@10.114,-2
CH_14: J2.29 J2.30 J2.31 J2.32 J6.13 U11.28 | length 25.2
  Top Layer w0.152: U11.28@-1.27,-4.216 -1.27,-5.381 -0.95,-5.701 J2.31@-0.95,-6.46 ; v1(-0.6,-8.9) -0.657,-8.843 -0.807,-8.843 -0.95,-8.7 ; J2.30@-0.55,-9.54 J2.32@-0.95,-9.54 -0.95,-8.7 ; J2.29@-0.55,-6.46 J2.31@-0.95,-6.46 ; -0.95,-8.7 -0.95,-8.142 -1.045,-8.047 -1.045,-7.438 -0.95,-7.343 J2.31@-0.95,-6.46
  Layer 3 w0.152: v1(-0.6,-8.9) -0.076,-8.376 1.749,-8.376 3.75,-6.375 4.78,-6.375 5.205,-5.95 8.675,-5.95 8.938,-6.213 10.233,-6.213 10.595,-6.575 11.225,-6.575 12.059,-5.741 12.059,-5.004 12.276,-4.787 12.276,-4.413 11.838,-3.975 11.625,-3.975 11.298,-3.648 11.058,-3.648 v1(11.01,-3.6)
  Bottom Layer w0.152: J6.13@10.114,-3.6 v1(11.01,-3.6)
CH_15: J2.33 J2.34 J2.35 J2.36 J6.15 U11.26 | length 26
  Top Layer w0.152: U11.26@-2.286,-4.216 -2.286,-5.241 -1.75,-5.777 J2.35@-1.75,-6.46 ; v1(-1.775,-7.3) -1.562,-7.087 ; -1.383,-9.903 -1.374,-9.894 ; J2.34@-1.35,-9.54 J2.36@-1.75,-9.54 -1.726,-9.516 -1.726,-9.064 -1.425,-8.763 -1.425,-7.225 -1.562,-7.087 ; J2.33@-1.35,-6.46 J2.35@-1.75,-6.46 ; J2.35@-1.75,-6.46 -1.736,-6.474 -1.736,-6.914 -1.562,-7.087
  Layer 3 w0.152: v1(-1.775,-7.3) -1.425,-7.65 -1.425,-9 -0.75,-9.675 -0.225,-9.675 0.35,-9.1 3.768,-9.1 5.994,-6.874 6.151,-6.874 6.725,-6.3 8.375,-6.3 8.87,-6.795 10.08,-6.795 v1(10.1,-6.775)
  Bottom Layer w0.152: v1(10.1,-6.775) 10.894,-6.775 11.193,-6.476 11.197,-6.476 11.5,-6.173 11.5,-5.5 11.2,-5.2 J6.15@10.114,-5.2
DATA_READY: U14.42 U18.11 | length 8.6
  Top Layer w0.203: U14.42@-22.13,-4.98 -22.13,-5.443 -21.972,-5.602 -21.972,-6.629 v1(-21.648,-6.953)
  Bottom Layer w0.152: v1@-21.648,-6.989 v1@-21.612,-6.953
  Bottom Layer w0.203: U18.11@-24.08,-2.075 -24.075,-2.08 -23.195,-2.08 -21.907,-3.368 -21.907,-4.229 -21.648,-4.488 -21.648,-6.017 -21.635,-6.03 -21.635,-6.676 -21.648,-6.689 v1(-21.648,-6.953)
DVCC1: C28.1 C29.2 C44.2 C45.2 C47.1 C48.1 C65.1 C68.1 C70.1 FB3.2 J12.37 L1.1 L2.1 R37.1 TP13.1 U11.18 U14.18 U14.49 U17.13 U18.13 | length 19.1
  Top Layer w0.203: C29.2@-6.095,-1 -6.075,-1 -5.917,-0.842 -5.808,-0.842 -5.798,-0.831 -5.742,-0.831 -5.611,-0.7 -5.55,-0.7 v1(-5.5,-0.65) -5.5,-0.583 -5.677,-0.407 -5.677,-0.148 C28.1@-5.775,-0.05 -5.775,0 -5.521,0.254 U11.18@-4.216,0.254
  Top Layer w0.24: C44.2@-30.4,2.15 -30.4,2.2 -29.88,2.72 -29.88,3.035 -29.74,3.175 C47.1@-29.72,3.175 -29.6,3.295 -29.196,3.295 -29.082,3.409 v1(-29.025,3.409) ; v1@-29.025,3.4 -29.025,3.352 -28.92,3.247 -28.92,3.195 -28.396,2.671 U14.18@-27.28,2.671 ; U14.49@-18.48,-4.331 -18.219,-4.331 -17.83,-4.72 -17.83,-5.12 -17.75,-5.2 C45.2@-17.7,-5.2 -17.62,-5.12 -16.775,-5.12 v1(-16.775,-4.65) ; C48.1@-16.8,-5.245 -16.7,-5.345 C70.1@-15.8,-5.345 ; v1(-16.1,-4.725) -16.1,-4.782 -15.94,-4.942 -15.94,-5.205 C70.1@-15.8,-5.345 ; L1.1@-14.35,-4.85 -14.35,-4.925 -14.73,-5.305 -15.76,-5.305 C70.1@-15.8,-5.345
  Bottom Layer w0.203: J12.37@-30.575,-0.98 -30.549,-1.005 -30.038,-1.005 -29.991,-1.052 -29.905,-1.052 -29.893,-1.064 -29.834,-1.064 -29.724,-1.175 v1(-29.657,-1.175) ; U17.13@-24.325,-8.77 -23.68,-8.77 v1(-23.282,-9.168) ; R37.1@-23.677,5.15 v1(-23.677,5.7) ; TP13.1@-18.408,8.669 -18.272,8.806 -18.272,9.378 v1(-18.225,9.425)
  Bottom Layer w0.24: v1(-24.559,-3.955) -24.559,-3.952 -24.325,-3.717 U18.13@-24.325,-3.12 ; v1(-16.775,-4.65) -16.525,-4.4 -16.525,-3.98 C68.1@-16.45,-3.905
  other v1: -29.3,8.45 -29.3,9.025 -17.629,9.42
ENV_DET_EN: R10.1 TP6.1 U4.A2 U5.1 U7.A2 U14.25 | length 32.6
  Top Layer w0.203: v1(-28.405,-1.288) -28.343,-1.288 -27.884,-0.83 U14.25@-27.28,-0.83 ; v1(-13.503,7.75) -13.456,7.797 -13.456,7.946 TP6.1@-12.777,8.625 -12.625,8.778 -12.021,8.778 -11.715,9.083 -11.696,9.083 -11.327,9.452 R10.1@-11.325,9.452
  Layer 3 w0.152: v1(-28.405,-1.288) -28.324,-1.288 -28.019,-0.983 -26.068,-0.983 -25.775,-0.69 -25.775,-0.68 -25.2,-0.106 -25.2,1.655 -21.205,5.65 -17.375,5.65 -15.275,7.75 v1(-13.503,7.75) -13.503,7.669 -13.25,7.416 -13.25,7.155 v1(-11.877,5.782)
  Bottom Layer w0.203: U5.1@-17.075,7.166 -17.075,6.809 -16.561,6.294 -14.962,6.294 -14.564,6.692 -14.564,7.211 -14.033,7.742 -13.511,7.742 v1(-13.503,7.75) ; v1@-13.428,7.941 -13.225,8.144 U4.A2@-13.225,8.15 ; v1(-11.877,5.782) -11.877,5.849 -11.704,6.022 -11.704,6.321 U7.A2@-11.7,6.325 ; v1(-13.503,7.75) -13.475,7.75 v1(-13.503,7.75)
ENV_OUT: TP3.1 U4.A1 U5.3 | length 3.5
  Bottom Layer w0.152: U5.3@-15.175,7.166 -15.175,8.1 -15.175,8.325 TP3.1@-14.6,8.9 -13.475,8.9 U4.A1@-13.225,8.65
FILTER_SHDN_N: R22.1 TP9.1 U10.5 U14.27 | length 25.3
  Top Layer w0.203: v1(-28.366,-2.525) -28.366,-2.488 -27.716,-1.839 -27.288,-1.839 U14.27@-27.28,-1.83 ; U10.5@-11.85,2.35 v1(-11.85,3)
  Layer 3 w0.152: v1(-28.366,-2.525) -28.286,-2.525 -27.348,-1.588 -25.818,-1.588 -25.17,-0.94 -25.17,-0.931 -24.595,-0.356 -24.595,1.405 -22.1,3.9 -21.5,3.9 -20.244,2.644 -20.244,2.605 -19.98,2.341 -16.99,2.341 -16.806,2.525 -12.325,2.525 v1(-11.85,3)
  Bottom Layer w0.203: R22.1@-12.498,3.225 -12.42,3.147 v1@-11.872,3.147 ; TP9.1@-11.875,1.95 -11.85,1.975 -11.85,3.075 -11.825,3.1 v1@-11.872,3.147 ; v1(-11.85,3) -11.85,3.125 v1@-11.872,3.147
GND: C2.1 C3.1 C5.2 C8.2 C12.2 C13.2 C14.2 C15.1 C16.1 C17.1 C18.2 C19.1 C20.1 C21.1 C22.2 C23.1 C24.2 C25.1 C26.2 C27.1 C28.2 C29.1 C30.2 C31.2 C32.2 C33.2 C34.2 C35.2 C39.1 C40.1 C41.2 C42.2 C43.1 C44.1 C45.1 C46.2 C47.2 C48.2 C49.1 C50.1 C51.2 C52.1 C53.1 C54.1 C55.1 C56.2 C57.2 C58.2 C59.2 C60.2 C61.2 C63.2 C64.2 C65.2 C66.2 C67.2 C68.2 C69.2 C70.2 C71.2 C72.1 C73.1 C74.1 C75.1 C76.1 C77.1 C78.2 C79.2 C80.1 D1.3 D2.1 J4.2 J4.4 J4.6 J4.8 J4.10 J4.12 J4.14 J4.16 J6.2 J6.4 J6.6 J6.8 J6.10 J6.12 J6.14 J6.16 J7.3 J9.1 J10.2 J10.3 J11.2 J11.3 J12.18 J12.33 J12.43 J13.1 J14.3 J15.2 J15.3 Q1.2 R4.1 R10.2 R11.2 R12.2 R14.1 R16.1 R18.1 R22.2 R26.2 R28.1 R29.1 R31.2 R32.2 R40.2 R43.2 R44.2 R46.1 TP15.1 U1.5 U1.17 U2.2 U3.4 U4.B1 U5.2 U6.B1 U7.B1 U8.B1 U9.7 U9.9 U10.2 U11.13 U11.17 U12.B1 U14.5 U14.8 U14.17 U14.33 U14.48 U14.55 U14.58 U14.61 U14.64 U14.65 U15.11 U16.B1 U17.8 U17.15 U18.5 U18.8 U18.16 X2.2 X2.4 Y1.2 | length 80.4
  Top Layer w0.152: J11.3@-24.606,-8.631 J11.3@-24.575,-8.6 ; J10.2@-21.675,-9.175 J10.2@-21.675,-8.6
  Top Layer w0.16: v1(-26.628,-2.581) -24.881,-2.581 U14.65@-22.88,-0.58 -24.3,0.84 -24.3,2.925
  Top Layer w0.203: J13.1@-30.6,-1.95 -30.251,-2.299 -30.201,-2.299 -29.831,-2.669 -29.732,-2.669 v1(-29.684,-2.716) ; C47.2@-30.49,2.99 C47.2@-30.48,3 ; C44.1@-29.6,2.15 -29.6,2.2 v1(-29.113,2.687) ; U14.65@-25.4,-1.825 -24.975,-1.825 U14.65@-24.925,-1.875 ; U14.65@-23.29,0.209 v1(-23.29,0.215) ; U14.65@-22.88,-0.58 U14.65@-21,1.3 ; U14.5@-21.13,3.82 -21.13,2.105 v1(-21.1,2.075) ; v1(-20.525,0.85) -20.525,0.714 -19.981,0.17 U14.58@-18.48,0.17 -17.737,0.17 -17.567,0 v1(-17.5,0) v1(-16.25,0) ; v1(-20.2,1.35) -20.95,1.35 U14.65@-21,1.3 ; v1(-20.12,-0.995) -20.12,-1.192 -19.981,-1.33 U14.55@-18.48,-1.33 ; C46.2@-18.545,5.55 -18.525,5.55 -18.075,6 v1(-18.075,6.026) ; U14.61@-18.48,1.671 -20.629,1.671 U14.65@-21,1.3 ; U14.64@-18.48,3.171 -18.458,3.171 -18.44,3.189 -18.44,3.96 v1(-18.4,4) C43.1@-18.4,4.65 ; C40.1@-17.15,-2.654 -17.15,-2.675 -16.65,-3.175 -16.65,-3.325 -16.075,-3.9 C42.2@-16,-3.9 -15.975,-3.925 v1(-15.25,-3.925) -15.297,-3.878 -15.297,-3.42 -15.35,-3.367 v1(-15.35,-3.3) ; C41.2@-16.371,-0.8 -16.25,-0.679 v1(-16.25,0) ; C39.1@-13.775,-0.95 -13.75,-0.925 v1(-13.75,0) v1(-15,0) v1(-16.25,0) ; v1(-13.644,1.8) -13.577,1.8 -13.31,1.533 -12.938,1.533 C25.1@-12.78,1.375 -12.76,1.375 -12.602,1.217 -12.602,0.868 -12.3,0.567 v1(-12.3,0.5) -12.274,0.474 -11.751,0.474 v1(-11.725,0.449) -11.658,0.449 -11.58,0.527 -11.173,0.527 C24.2@-11.075,0.625 C24.2@-11.075,0.625 -10.051,0.626 R14.1@-10.05,0.627 ; C27.1@-7.475,-0.075 -7.375,-0.075 -7.078,-0.372 -7.078,-0.428 -7.07,-0.436 -6.964,-0.436 v1(-6.9,-0.5) ; C29.1@-6.855,-1 -6.953,-0.902 -6.938,-0.902 -6.877,-0.842 -6.877,-0.522 v1(-6.9,-0.5) ; C28.2@-6.575,-0.05 -6.575,-0.1 -6.786,-0.311 -6.786,-0.386 v1(-6.9,-0.5) ; C26.2@-5.925,2.2 -5.886,2.239 -5.49,2.239 -4.973,2.756 -4.255,2.756 U11.13@-4.216,2.794
  Top Layer w0.3: C72.1@-8.75,7.5 -8.709,7.5 -8.36,7.849 v1(-8.319,7.849)
  Top Layer w0.4: C52.1@-16.446,8.65 -16.349,8.553 -16.349,6.649 Y1.2@-15.8,6.1 -15.34,6.56 -15.34,8.489 C54.1@-15.204,8.625 ; C22.2@-9.124,-9.125 -9,-9.001 -9,-7.275 U9.7@-8.975,-7.25
  Bottom Layer w0.152: J12.33@-30.575,-2.58 -29.901,-2.58 -29.765,-2.716 v1(-29.684,-2.716) ; J12.43@-30.575,1.42 -29.866,1.42 -29.611,1.675 -29.611,2.339 -29.492,2.458 -29.374,2.458 -29.144,2.687 v1(-29.113,2.687) ; v1(-25.576,0.05) -25.564,0.038 -25.512,0.038 -25.512,-0.618 U18.5@-25.525,-0.63
  Bottom Layer w0.16: J12.18@-27.425,-2.58 v1(-26.628,-2.581) ; 9.5,-6.775 9.435,-6.71 9.435,-6.425 9.86,-6 J6.16@10.114,-6
  Bottom Layer w0.2: v1(-8.319,7.849) -8.319,7.917 -8.155,8.081 -8.155,8.37 U6.B1@-8.15,8.375
  Bottom Layer w0.203: C71.2@-26.005,-4.925 -25.897,-4.817 -25.897,-4.56 -25.954,-4.504 -25.954,-4.109 -25.897,-4.052 -25.897,-3.997 v1@-25.851,-3.951 ; v1(-25.926,-3.852) -25.926,-3.881 -25.884,-3.923 -25.882,-3.923 -25.866,-3.939 v1@-25.864,-3.939 ; v1@-25.863,-3.939 v1@-25.851,-3.951 ; U18.16@-25.525,-3.12 -25.525,-3.385 -25.803,-3.663 -25.803,-3.903 v1@-25.851,-3.951 ; v1(-25.214,-9.458) -25.166,-9.411 -25.166,-9.248 -25.133,-9.215 -25.133,-8.778 U17.15@-25.125,-8.77 ; U17.8@-24.325,-6.28 -24.325,-6.411 -24.317,-6.419 v1(-23.953,-6.419) ; U18.8@-24.325,-0.63 -24.325,-0.742 -24.317,-0.75 v1(-23.875,-0.75) ; R46.1@-23.823,0.5 -23.823,0.498 -23.69,0.365 -23.44,0.365 v1(-23.29,0.215) ; R22.2@-13.402,3.225 -13.267,3.36 -13.267,3.759 v1(-13.22,3.806) ; v1(-11.442,7.542) -11.442,7.475 -11.204,7.238 -11.204,6.829 U7.B1@-11.2,6.825 U7.B1@-11.196,6.829 ; v1(-8.606,6.031) -8.325,5.75 U1.17@-8.303,5.75 U1.17@-8.005,5.452 ; v1(-8.005,5.43) U1.17@-8.005,5.452 ; U1.5@-7.553,4.397 -7.553,4.69 -7.655,4.792 -7.655,5.102 U1.17@-8.005,5.452
  Bottom Layer w0.3: -22.655,3.575 -22.382,3.575 -22.154,3.803 -22.154,4.089 -22.018,4.225 C51.2@-21.996,4.225 ; C80.1@-18.05,-3.625 C80.1@-18.025,-3.6 ; C77.1@-9.25,9.079 -9.25,9.1 -8.929,9.421 -8.929,9.471 v1(-8.9,9.5) ; C3.1@-8.2,1.996 -8.169,1.964 -8.169,1.48 -8.012,1.323 v1(-8.012,1.283) ; R28.1@-1.977,8.225 -1.977,8.227 -1.707,8.497 -1.707,8.793 -1.575,8.925 -1.45,8.925 -1.369,8.844 -1.327,8.844 v1(-1.299,8.815) ; C33.2@0.147,-6.251 1.102,-6.251 1.3,-6.45 ; C32.2@0.701,-5 0.75,-5 1.103,-5.353 1.103,-5.403 1.3,-5.599 1.3,-6.45 ; C57.2@2.275,-6.751 2.275,-6.8 C57.2@2.2,-6.875 ; 1.3,-6.875 v1(1.3,-7.3) 1.329,-7.271 1.754,-7.271 1.872,-7.153 1.922,-7.153 C57.2@2.2,-6.875 ; 1.3,-6.875 1.3,-6.45 ; 1.3,-6.875 C57.2@2.2,-6.875
  Bottom Layer w0.4: C8.2@-4,6.6 -3.95,6.6 -3.86,6.69 v1@-3.585,6.69 ; U2.2@-3.8,5 -3.785,5.015 -3.785,5.915 v1(-3.775,5.925) -3.775,5.939 -3.585,6.129 v1@-3.585,6.69 ; C34.2@0.193,-8.982 0.193,-9.644 0.5,-9.951 ; v1@-3.585,6.69 v1(-3.575,6.7) v1@-3.585,6.69
  other v1: -3.35,-9.625 -17.6,-9.6 -4.25,-9.55 6.25,-9.55 -20.275,-9.475 -28.775,-9.25 -17.594,-8.925 9.6,-8.5 10.9,-8.5 12.1,-8.5 -20.25,-8.375 -15.35,-8.15 -17.619,-8.05 -28.8,-7.875 9.6,-7.6 -19.075,-6.775 6.166,-6.326 -18.519,-6.2 -3.089,-6.036 12.35,-6 -27,-5.875 -9.125,-5.548 -8.125,-5.548 -9.125,-4.548 -8.125,-4.548 6.075,-4.515 12.348,-3.952 -4.725,-3.325 -23.8,-3 -20.997,-2.397 11.5,-2 12.4,-2 11.5,-1 12.4,-1 -22.197,-0.892 -8.541,-0.849 -7.725,-0.8 11.5,0 12.4,0 -2.1,0.3 -6.1,0.6 11.5,1 12.4,1 6.25,1.075 -23.792,1.376 2.129,1.454 3.041,1.741 -21.575,1.775 11.5,2 12.4,2 -25.458,2.357 11.5,3 12.4,3 -28.65,3.925 11.5,4 12.4,4 -11.495,4.243 -12.2,4.28 11.5,5 12.4,5 6.256,5.025 -30,5.202 -8.636,5.441 -13.045,5.81 -30.2,5.9 11.5,6 12.4,6 -8.005,6.023 -26.1,6.4 6.256,6.4 -26.1,7.5 9.5,7.5 10.5,7.5 -18.1,7.7 6.231,7.975 9.5,8.5 10.5,8.5 11.5,8.5 12.4,8.5 -26.1,8.9 -30.7,9.21 6.181,9.35 -12.057,9.464 -21.9,9.6 -16.5,9.6 -15.2,9.6 -7.375,9.6 -4.6,9.6 -3.4,9.625
HFXIN: C50.2 U14.9 X2.3 | length 7.8
  Top Layer w0.2: X2.3@-24.25,8.95 -24.18,8.88 -24.005,8.88 C50.2@-21.919,8.88
  Top Layer w0.203: X2.3@-24.005,8.88 -23.148,8.023 -23.148,3.838 U14.9@-23.13,3.82
HFXOUT: R35.2 U14.10 | length 2
  Top Layer w0.203: R35.2@-24.4,5.325 -24.289,5.214 -23.914,5.214 -23.63,4.93 U14.10@-23.63,3.82
HOST_LINK_RDY: U14.41 U18.12 | length 5.6
  Top Layer w0.203: U14.41@-22.63,-4.98 -22.612,-4.998 -22.612,-5.273 -22.499,-5.386 ; -22.499,-5.387 -22.496,-5.39 -22.496,-5.823 v1(-22.448,-5.87)
  Bottom Layer w0.152: v1(-22.448,-5.87) v1@-22.368,-5.87
  Bottom Layer w0.203: U18.12@-24.08,-2.475 -24.072,-2.483 -23.467,-2.483 -22.326,-3.624 -22.326,-4.442 -22.448,-4.564 v1(-22.448,-5.87)
HOST_SPARE: U14.43 U18.9 | length 9.2
  Top Layer w0.203: U14.43@-21.63,-4.984 -21.612,-5.002 -21.612,-5.29 -21.584,-5.317 -21.584,-6.266 v1(-21.075,-6.775)
  Bottom Layer w0.203: U18.9@-24.08,-1.275 -24.072,-1.284 -23.341,-1.284 -21.497,-3.128 ; -21.486,-3.139 -21.486,-3.315 -21.485,-3.316 -21.485,-4.152 -21.259,-4.378 -21.259,-6.591 v1(-21.075,-6.775)
HOST_SPI_CLK: U14.36 U17.11 | length 6.6
  Top Layer w0.203: U14.36@-25.13,-4.98 -25.112,-4.998 -25.112,-5.39 -24.567,-5.934 -23.742,-5.934 -23.476,-6.2 -23.476,-6.391 -23.16,-6.708 -22.547,-6.708 -22.547,-6.703 -22.546,-6.696 v1(-22.55,-6.695) v1(-22.55,-6.695)
  Layer 3 w0.152: v1(-22.55,-6.695) v1(-22.55,-6.695) -22.546,-6.696 -22.546,-6.702 v1@-22.547,-6.708
  Bottom Layer w0.203: U17.11@-24.08,-7.725 -24.072,-7.733 -23.561,-7.733 -23.483,-7.812 -23.483,-7.815 -23.204,-8.094 -23.201,-8.094 -23.187,-8.108 -22.824,-8.108 -22.518,-7.802 -22.518,-6.737 -22.547,-6.708 -22.547,-6.703 -22.546,-6.696 v1(-22.55,-6.695) v1(-22.55,-6.695)
HOST_SPI_CS: U14.37 U17.9 | length 3.8
  Top Layer w0.152: U14.37@-24.63,-4.98 -24.586,-5.024 -24.586,-5.343 -24.569,-5.36 -24.323,-5.607 -23.59,-5.607 -22.965,-6.232 v1(-22.951,-6.232)
  Layer 3 w0.152: v1@-22.957,-6.237 v1(-22.951,-6.232)
  Bottom Layer w0.203: U17.9@-24.08,-6.925 -24.072,-6.917 -23.777,-6.917 -23.15,-6.29 -22.998,-6.29 -22.951,-6.243 v1(-22.951,-6.232)
HOST_SPI_MISO: U14.35 U17.12 | length 7.4
  Top Layer w0.203: U14.35@-25.63,-4.98 -25.628,-4.982 -25.628,-5.422 -24.154,-6.896 -23.471,-6.896 -23.263,-7.104 -22.846,-7.104 -22.493,-7.457 -22.493,-8.318 -22.85,-8.675 -22.83,-8.695 v1(-22.83,-8.745)
  Bottom Layer w0.203: U17.12@-24.08,-8.125 -24.072,-8.133 -23.767,-8.133 -23.26,-8.641 -23.001,-8.641 -22.896,-8.745 v1(-22.83,-8.745)
HOST_SPI_MOSI: U14.34 U17.10 | length 5.9
  Top Layer w0.203: U14.34@-26.13,-4.98 -26.112,-4.998 -26.112,-5.488 -24.352,-7.248 -23.946,-7.248 -23.737,-7.457 -23.237,-7.457 -23.213,-7.481 -23.185,-7.481 -23.061,-7.605 -23.007,-7.605 v1(-23.007,-7.617)
  Layer 3 w0.152: v1@-23.053,-7.571 v1(-23.007,-7.617)
  Bottom Layer w0.203: U17.10@-24.08,-7.325 -23.23,-7.325 -23.061,-7.494 -22.994,-7.494 -22.994,-7.605 v1(-23.007,-7.617)
HV_EN1: R43.1 U14.50 U15.9 | length 17
  Top Layer w0.203: U14.50@-18.48,-3.831 -18.019,-3.831 -17.847,-4.003 -17.197,-4.003 v1(-17.15,-4.05)
  Layer 3 w0.152: v1(-17.15,-4.05) -15.9,-2.8 -14.55,-2.8 -13.178,-4.172 -7.969,-4.172 -7.072,-5.069 -6.648,-5.069 -6.393,-5.325 v1(-6.312,-5.325)
  Bottom Layer w0.203: U15.9@-7.2,-5.548 -6.498,-5.548 -6.389,-5.439 v1@-6.312,-5.439 ; v1(-6.312,-5.325) v1@-6.312,-5.439 ; R43.1@-4.531,-5.439 -5.115,-5.439 -5.453,-5.777 -5.847,-5.777 -6.225,-5.399 -6.272,-5.399 v1@-6.312,-5.439
HV_EN2: R44.1 U14.51 U15.8 | length 17.9
  Top Layer w0.203: U14.51@-18.48,-3.331 -17.856,-3.331 -17.762,-3.425 v1(-17.225,-3.425)
  Layer 3 w0.152: v1(-17.225,-3.425) -16.175,-2.375 -14.3,-2.375 -13.344,-3.331 -8.369,-3.331 -6.933,-4.767 -6.183,-4.767 v1(-5.65,-5.3)
  Bottom Layer w0.203: U15.8@-7.2,-5.048 -7.196,-5.044 -6.705,-5.044 -6.509,-4.848 -6.115,-4.848 -5.663,-5.3 v1(-5.65,-5.3) ; v1@-5.65,-5.234 -5.603,-5.187 -5.603,-5.053 -5.225,-4.675 R44.1@-4.427,-4.675
HV_MUX_CLR: U11.22 U14.31 | length 30.6
  Top Layer w0.203: U14.31@-27.28,-3.831 -27.261,-3.849 -26.798,-3.849 -26.447,-4.2 v1(-26.43,-4.2) ; U11.22@-4.216,-1.778 -3.078,-1.778 v1(-3.05,-1.75)
  Layer 3 w0.152: v1(-26.43,-4.2) -26.4,-4.17 -26.4,-3.625 -26.077,-3.302 -25.598,-3.302 -25.026,-3.874 -25.026,-4.499 -24.55,-4.975 -23.425,-4.975 -23.15,-4.7 -21.95,-4.7 -21.463,-4.213 -21.463,-3.588 -18.4,-0.525 -9.877,-0.525 -9.226,0.126 -4.926,0.126 v1(-3.05,-1.75)
HV_MUX_LE: U11.21 U14.46 | length 18.7
  Top Layer w0.203: U14.46@-20.13,-4.98 -20.112,-4.961 -20.112,-4.536 -19.994,-4.418 -19.994,-4.375 -19.861,-4.242 v1(-19.861,-4.175) ; v1(-5.575,-1.675) -5.17,-1.27 U11.21@-4.216,-1.27
  Layer 3 w0.152: v1(-19.861,-4.175) -19.861,-3.086 -18.075,-1.3 -6.925,-1.3 -6.55,-1.675 v1(-5.575,-1.675)
HV_MUX_PWR_EN: TP10.1 U12.B2 U14.44 | length 16.5
  Top Layer w0.152: U14.44@-21.13,-4.98 -21.086,-4.936 -21.086,-4.63 -20.856,-4.4 -20.73,-4.4 -20.551,-4.221 v1(-20.47,-4.221)
  Top Layer w0.203: v1(-8.925,-0.35) -8.925,0.169 -8.9,0.194 U12.B2@-8.9,0.2
  Layer 3 w0.152: v1(-20.47,-4.221) -20.47,-3.17 -18.2,-0.9 -9.475,-0.9 v1(-8.925,-0.35)
  Bottom Layer w0.203: TP10.1@-9.75,0.225 -9.215,-0.31 -8.965,-0.31 v1(-8.925,-0.35)
HV_PWR_EN: U14.52 U16.B2 | length 3.9
  Top Layer w0.203: v1(-19.275,-4.306) -19.322,-4.259 -19.322,-3.247 -18.924,-2.849 -18.498,-2.849 U14.52@-18.48,-2.831
  Bottom Layer w0.203: v1(-19.275,-4.306) -19.275,-4.85 -19.1,-5.025 U16.B2@-18.075,-5.025
JTAG_RESET_N: C51.1 J12.50 R37.2 U14.12 | length 11.4
  Top Layer w0.203: v1(-24.826,4.578) -24.798,4.578 -24.798,4.512 -24.63,4.345 U14.12@-24.63,3.82
  Layer 3 w0.152: v1@-29.732,4.393 -28.625,5.5 -25.25,5.5 -24.855,5.105 -24.855,4.635 -24.812,4.592 v1(-24.826,4.578)
  Bottom Layer w0.152: J12.50@-30.575,4.22 -29.834,4.22 -29.755,4.299 -29.674,4.299 v1(-29.675,4.45) ; v1(-24.826,4.578) v1@-24.798,4.578 ; v1@-24.796,4.579 v1@-24.798,4.578 ; R37.2@-22.873,5.15 -22.854,5.131 C51.1@-22.854,4.225 -23.029,4.05 -24.575,4.05 -24.741,4.216 -24.741,4.521 v1@-24.798,4.578
JTAG_TCK: J12.49 U14.16 | length 5.1
  Top Layer w0.203: v1(-27.393,4.842) -27.345,4.795 -27.345,4.717 -26.973,4.345 -26.853,4.345 -26.648,4.14 -26.648,3.838 U14.16@-26.63,3.82
  Layer 3 w0.152: v1(-29.526,3.81) -29.526,3.874 -28.558,4.842 v1(-27.393,4.842)
  Bottom Layer w0.152: J12.49@-30.575,3.82 -29.536,3.82 v1(-29.526,3.81)
JTAG_TDI: J12.39 U14.14 | length 9
  Top Layer w0.203: v1(-26.101,4.766) -26.054,4.718 -26.054,4.554 -25.648,4.148 -25.648,3.838 U14.14@-25.63,3.82
  Layer 3 w0.152: v1(-29.273,-0.267) -29.216,-0.21 -29.01,-0.21 -27.95,0.85 -27.95,2.917 v1(-26.101,4.766)
  Bottom Layer w0.152: J12.39@-30.575,-0.18 -30.012,-0.18 -29.968,-0.137 -29.484,-0.137 -29.353,-0.267 v1(-29.273,-0.267)